# EAGLE board CT_schematic (EAGLE 7.6.0)

Size 100 x 80 mm. Coordinates in mm from the lower left corner, seen from the top.
Outline: 0,0 100,0 100,80 0,80 0,0
Copper layers (1*16): Top 0.035mm / dielectric 1.5mm / Bottom 0.035mm
Design rules "default": minimum track width 10mil, minimum drill 24mil, track to track 8mil, track to pad 8mil, pad to pad 8mil, via to via 8mil, smd to smd 8mil, copper to edge 40mil, drill to drill 8mil, minimum pad ring 10mil, minimum via ring 8mil, stop-mask expansion 4mil, vias tented up to drill 0mil, thermal gap 10mil

## Footprints (pad centres in the part's own frame; a part is rotated, then mirrored left to right if it is on the bottom)
C0603 = smd 0.8 x 0.8: 1 -0.762,0; 2 0.762,0
C0402 = smd 0.5 x 0.5: 1 -0.508,0; 2 0.508,0
C0805 = smd 1.2 x 1.3: 1 -1.016,0; 2 1.016,0
C1206 = smd 1.3 x 1.6: 1 -1.524,0; 2 1.524,0
L0603 = smd 0.8 x 0.8: 1 -0.762,0; 2 0.762,0
L0805 = smd 1.2 x 1.3: 1 -1.016,0; 2 1.016,0
R0603 = smd 0.8 x 0.8: 1 -0.762,0; 2 0.762,0
LQFP64 = smd 0.3 x 1.2: 1 -3.75,-5.75; 2 -3.25,-5.75; 3 -2.75,-5.75; 4 -2.25,-5.75; 5 -1.75,-5.75; 6 -1.25,-5.75; 7 -0.75,-5.75; 8 -0.25,-5.75; 9 0.25,-5.75; 10 0.75,-5.75; 11 1.25,-5.75; 12 1.75,-5.75; 13 2.25,-5.75; 14 2.75,-5.75; 15 3.25,-5.75; 16 3.75,-5.75; 33 3.75,5.75; 34 3.25,5.75; 35 2.75,5.75; 36 2.25,5.75; 37 1.75,5.75; 38 1.25,5.75; 39 0.75,5.75; 40 0.25,5.75; 41 -0.25,5.75; 42 -0.75,5.75; 43 -1.25,5.75; 44 -1.75,5.75; 45 -2.25,5.75; 46 -2.75,5.75; 47 -3.25,5.75; 48 -3.75,5.75 | smd 1.2 x 0.3: 17 5.75,-3.75; 18 5.75,-3.25; 19 5.75,-2.75; 20 5.75,-2.25; 21 5.75,-1.75; 22 5.75,-1.25; 23 5.75,-0.75; 24 5.75,-0.25; 25 5.75,0.25; 26 5.75,0.75; 27 5.75,1.25; 28 5.75,1.75; 29 5.75,2.25; 30 5.75,2.75; 31 5.75,3.25; 32 5.75,3.75; 49 -5.75,3.75; 50 -5.75,3.25; 51 -5.75,2.75; 52 -5.75,2.25; 53 -5.75,1.75; 54 -5.75,1.25; 55 -5.75,0.75; 56 -5.75,0.25; 57 -5.75,-0.25; 58 -5.75,-0.75; 59 -5.75,-1.25; 60 -5.75,-1.75; 61 -5.75,-2.25; 62 -5.75,-2.75; 63 -5.75,-3.25; 64 -5.75,-3.75
SOIC-8 = smd 1.6 x 0.6: 1 -2.7,1.905 | smd 1.55 x 0.6: 2 -2.7,0.635; 3 -2.7,-0.635; 4 -2.7,-1.905; 5 2.7,-1.905; 6 2.7,-0.635; 7 2.7,0.635; 8 2.7,1.905
SAMTEC_FTSH-105-01-L-DV-K = smd 0.762 x 2.794: 1 -2.54,-2.032; 2 -2.54,2.032; 3 -1.27,-2.032; 4 -1.27,2.032; 5 0,-2.032; 6 0,2.032; 7 1.27,-2.032; 8 1.27,2.032; 9 2.54,-2.032; 10 2.54,2.032
WNG008 = smd 0.45 x 0.55: 1 -1.27,0; 2 0,0; 3 1.27,0; 4 2.54,0; 5 2.54,7.5; 6 1.27,7.5; 7 0,7.5; 8 -1.27,7.53 | smd 4.9 x 4.75: PAD 0.635,3.75
ABLS-25.000MHZ-B2F-T = smd 5.6 x 2.8: 1 -3.81,0; 2 5.69,0
ASEK = smd 1.4 x 1: 1 -1.1,-0.8; 2 1.1,-0.8; 3 1.1,0.8; 4 -1.1,0.8
TSOT-23-5 = smd 1.3 x 0.62: 1 -1.31,0.95; 2 -1.31,0; 3 -1.31,-0.95; 4 1.31,-0.95; 5 1.31,0.95
DFN8_2X3MC = smd 0.813 x 0.305: 1 -1.398,0.75; 2 -1.398,0.25; 3 -1.398,-0.25; 4 -1.398,-0.75; 5 1.398,-0.75; 6 1.398,-0.25; 7 1.398,0.25; 8 1.398,0.75 | smd 1.753 x 1.549: 9 0,0
JST-2-SMD = smd 1 x 4.6: 1 -1,-3.7; 2 1,-3.7 | smd 1.6 x 3.4: NC1 -3.4,1.5; NC2 3.4,1.5
FCI_10118193-0001LF = smd 0.4 x 1.35: 1 -1.3,2.675; 2 -0.65,2.675; 3 0,2.675; 4 0.65,2.675; 5 1.3,2.675 | smd 1.6 x 1.4: 6 -3.2,2.45; 7 3.2,2.45 | smd 1.9 x 1.9: 8 -1.2,0; 9 1.2,0 | hole 0.5: -3.3,0; 3.3,0
SON-6 = smd 0.55 x 0.3: 1 -0.355,0.5 | smd 0.52 x 0.3: 2 -0.37,0; 3 -0.37,-0.5; 4 0.37,-0.5; 5 0.37,0; 6 0.37,0.5
SW_4-1437565-2 = smd 1.4 x 2.1: 1 -2.23,4.55; 2 -2.23,-4.55; 3 2.23,4.55; 4 2.23,-4.55
LGM67K-G1J2-24-Z = smd 0.8 x 1.4: A -2,0; C 0,0
NC7SZ125M5X = smd 1.3 x 0.7: 1 -1.3,0.95; 2 -1.3,0; 3 -1.3,-0.95; 4 1.3,-0.95; 5 1.3,0.95
DUMMY_PACKAGE_137 = drill 0.3: 1 0,-1; 2 1.5,-1; 3 3,-1

## Placement (x,y rotation side)
C1  1e-06  [C0603]  -27.94,58.42 0 top  (outside the outline)
C2  1e-07  [C0603]  -31.75,58.42 0 top  (outside the outline)
C3  1e-07  [C0603]  -35.56,58.42 0 top  (outside the outline)
C4  1e-07  [C0603]  -39.37,58.42 0 top  (outside the outline)
C5  1e-07  [C0603]  -43.18,58.42 0 top  (outside the outline)
C6  1e-07  [C0603]  -46.99,58.42 0 top  (outside the outline)
C7  4.7e-06  [C0603]  -24.13,58.42 0 top  (outside the outline)
C8  1e-08  [C0603]  -50.8,58.42 0 top  (outside the outline)
C9  1e-06  [C0603]  -54.61,58.42 0 top  (outside the outline)
C10  1e-11  [C0402]  -26.67,63.5 0 top  (outside the outline)
C11  1e-11  [C0402]  -30.48,63.5 0 top  (outside the outline)
C12  1e-08  [C0402]  -34.29,63.5 0 top  (outside the outline)
C13  1e-07  [C0402]  -38.1,63.5 0 top  (outside the outline)
C14  1e-08  [C0402]  -41.91,63.5 0 top  (outside the outline)
C15  1e-08  [C0402]  -45.72,63.5 0 top  (outside the outline)
C16  1e-05  [C0805]  -21.59,46.99 0 top  (outside the outline)
C17  1e-05  [C0805]  -26.67,46.99 0 top  (outside the outline)
C18  1e-07  [C0402]  -49.53,63.5 0 top  (outside the outline)
C19  1e-05  [C1206]  -49.53,39.37 0 top  (outside the outline)
C20  1e-05  [C1206]  -55.88,39.37 0 top  (outside the outline)
C21  1e-08  [C0402]  -53.34,63.5 0 top  (outside the outline)
C22  1e-08  [C0402]  -57.15,63.5 0 top  (outside the outline)
F1  240.0  [L0603]  -58.42,58.42 0 top  (outside the outline)
I1  2.2e-06  [L0805]  -31.75,46.99 0 top  (outside the outline)
R2  1000.0  [R0603]  -62.23,58.42 0 top  (outside the outline)
R4  4700.0  [R0603]  -66.04,58.42 0 top  (outside the outline)
R5  10000.0  [R0603]  -64.77,46.99 0 top  (outside the outline)
R6  10000.0  [R0603]  -15.24,53.34 0 top  (outside the outline)
R7  10000.0  [R0603]  -20.32,53.34 0 top  (outside the outline)
R8  10000.0  [R0603]  -25.4,53.34 0 top  (outside the outline)
R9  10000.0  [R0603]  -30.48,53.34 0 top  (outside the outline)
R10  10000.0  [R0603]  -35.56,53.34 0 top  (outside the outline)
R11  10000.0  [R0603]  -40.64,53.34 0 top  (outside the outline)
R12  10000.0  [R0603]  -45.72,53.34 0 top  (outside the outline)
R13  5.0  [R0603]  -15.24,63.5 0 top  (outside the outline)
R14  10000.0  [R0603]  -50.8,53.34 0 top  (outside the outline)
R15  10000.0  [R0603]  -55.88,53.34 0 top  (outside the outline)
R16  10000.0  [R0603]  -60.96,53.34 0 top  (outside the outline)
R17  220000.0  [R0603]  -49.53,46.99 0 top  (outside the outline)
R18  1000000.0  [R0603]  -44.45,46.99 0 top  (outside the outline)
R19  10000.0  [R0603]  -66.04,53.34 0 top  (outside the outline)
R20  10000.0  [R0603]  -15.24,58.42 0 top  (outside the outline)
R21  9100.0  [R0603]  -19.05,63.5 0 top  (outside the outline)
R22  680000.0  [R0603]  -54.61,46.99 0 top  (outside the outline)
R23  120000.0  [R0603]  -59.69,46.99 0 top  (outside the outline)
R24  2000.0  [R0603]  -22.86,63.5 0 top  (outside the outline)
R25  10000.0  [R0603]  -20.32,58.42 0 top  (outside the outline)
U1  STM32F301R8T6  [LQFP64]  -53.34,7.62 0 top  (outside the outline)
U2  AT25160B-SSHL-T  [SOIC-8]  -24.13,31.75 0 top  (outside the outline)
U3  FTSH-105-01-L-DV-K  [SAMTEC_FTSH-105-01-L-DV-K]  -35.56,7.62 0 top  (outside the outline)
U4  S25FL128SDPNFI001  [WNG008]  -48.26,17.78 0 top  (outside the outline)
U5  ABLS-25.000MHZ-B2F-T  [ABLS-25.000MHZ-B2F-T]  -26.67,40.64 0 top  (outside the outline)
U6  ASEK-32.768KHz-ECST  [ASEK]  -55.88,30.48 0 top  (outside the outline)
U7  ltc3406es5  [TSOT-23-5]  -36.83,46.99 0 top  (outside the outline)
U8  MCP73831T-2ACI/MC  [DFN8_2X3MC]  -20.32,67.31 0 top  (outside the outline)
U9  S2B-PH-SM4-TB(LF)(SN)  [JST-2-SMD]  -60.96,21.59 0 top  (outside the outline)
U10  10118193-0001LF  [FCI_10118193-0001LF]  -34.29,30.48 0 top  (outside the outline)
U11  TPS3895ADRYR  [SON-6]  -13.97,67.31 0 top  (outside the outline)
U12  4-1437565-2  [SW_4-1437565-2]  -27.94,20.32 0 top  (outside the outline)
U13  Q65110A2395  [LGM67K-G1J2-24-Z]  -38.1,39.37 0 top  (outside the outline)
U14  nc7sz125m5x  [NC7SZ125M5X]  -60.96,38.1 0 top  (outside the outline)
U15  nc7sz125m5x  [NC7SZ125M5X]  -15.24,46.99 0 top  (outside the outline)
U16  Dummy  [DUMMY_PACKAGE_137]  -63.5,63.5 0 top  (outside the outline)

## Library data of the parts
C1-C22 F1 I1 R2 R4-R25 U1-U16 = circuit_tree

## Nets
CLK_CRYSTAL_U1_5: C10.1 U1.5 U5.1
CLK_CRYSTAL_U1_6: C11.1 U1.6 U5.2
CLK_U1_3: U1.3 U6.3
GND: C1.2 C2.2 C3.2 C4.2 C5.2 C6.2 C7.2 C8.2 C9.2 C10.2 C11.2 C12.2 C13.2 C14.2 C15.2 C16.2 C17.1 C17.2 C18.2 C19.2 C20.2 C21.2 C22.2 R2.2 R5.2 R12.2 R13.2 R17.2 R21.2 R23.2 R24.2 U1.12 U1.18 U1.31 U1.47 U1.63 U2.4 U3.3 U3.5 U4.4 U4.PAD U6.2 U7.2 U8.6 U8.9 U9.2 U10.5 U10.6 U10.7 U10.8 U10.9 U11.2 U13.C U14.2 U14.3 U15.1 U15.3 U16.1
INPUT_USBPOWER_5V: C19.1 R25.2 U8.1 U8.2 U10.1
NET_U1_7: R4.1 U1.7 U15.4
NET_U1_13: C8.1 C9.1 F1.1 U1.13
NET_U1_60: R5.1 U1.60
NET_U1_61: U13.A
NET_U1_62: U12.3 U12.4
NET_U2_3: R6.1 U2.3
NET_U2_7: R8.1 U2.7
NET_U3_9: R13.1 U3.9
NET_U4_3: R14.1 U4.3
NET_U4_7: R16.1 U4.7
NET_U7_1: U7.1
NET_U7_3: I1.1 U7.3
NET_U7_5: R17.1 R18.1 U7.5
NET_U7_ATNET_3: I1.2 R18.2
NET_U8_5: R25.1 U8.5
NET_U8_8: R24.1 U8.8
NET_U11_1: R20.1 R21.1 U11.1
NET_U11_3: R22.2 R23.1 U11.3
NET_U11_4: R19.1 U11.4 U14.4 U15.2
NET_U12_1: R2.1 U12.1 U12.2
PROC_SPI2_MISO: U1.35 U4.2
PROC_SPI2_MOSI: U1.36 U4.5
PROC_SPI2_NSS: R15.1 U1.33 U4.1
PROC_SPI2_SCK: U1.34 U4.6
PROC_SPI3_MISO: U1.52 U2.2
PROC_SPI3_MOSI: U1.53 U2.5
PROC_SPI3_NSS: R7.1 U1.20 U2.1
PROC_SPI3_SCK: U1.51 U2.6
PROC_SYS_JTCK_SWCLK: R12.1 U1.49 U3.4
PROC_SYS_JTDI: R10.1 U1.50 U3.8
PROC_SYS_JTDO_TRACESWO: U1.55 U3.6
PROC_SYS_JTMS_SWDIO: R11.1 U1.46 U3.2
PROC_TIM1_CH2: U1.9 U16.2
PROC_TIM1_CH4: U1.11 U16.3
RST_OUT_U3_JTAG_RST_B: R9.1 U3.10 U14.1
VCC_S1_3V7: C16.1 C20.1 U7.4 U8.3 U8.4 U9.1
VCC_TIER1_3V3: C1.1 C2.1 C3.1 C4.1 C5.1 C6.1 C7.1 C12.1 C13.1 C14.1 C15.1 C17.2 C18.1 C21.1 C22.1 F1.2 I1.2 R4.2 R6.2 R7.2 R8.2 R9.2 R10.2 R11.2 R14.2 R15.2 R16.2 R18.2 R19.2 R20.2 R22.1 U1.1 U1.19 U1.32 U1.48 U1.64 U2.8 U3.1 U4.8 U6.4 U11.6 U14.5 U15.5

## Tracks (layer width: path | path; a pad name or v marks a point on that pad's centre or on a via)
CLK_CRYSTAL_U1_5  (2 unrouted)
CLK_CRYSTAL_U1_6  (2 unrouted)
CLK_U1_3  (1 unrouted)
GND  (57 unrouted)
INPUT_USBPOWER_5V  (4 unrouted)
NET_U1_7  (2 unrouted)
NET_U1_13  (3 unrouted)
NET_U1_60  (1 unrouted)
NET_U1_62  (1 unrouted)
NET_U2_3  (1 unrouted)
NET_U2_7  (1 unrouted)
NET_U3_9  (1 unrouted)
NET_U4_3  (1 unrouted)
NET_U4_7  (1 unrouted)
NET_U7_3  (1 unrouted)
NET_U7_5  (2 unrouted)
NET_U7_ATNET_3  (1 unrouted)
NET_U8_5  (1 unrouted)
NET_U8_8  (1 unrouted)
NET_U11_1  (2 unrouted)
NET_U11_3  (2 unrouted)
NET_U11_4  (3 unrouted)
NET_U12_1  (2 unrouted)
PROC_SPI2_MISO  (1 unrouted)
PROC_SPI2_MOSI  (1 unrouted)
PROC_SPI2_NSS  (2 unrouted)
PROC_SPI2_SCK  (1 unrouted)
PROC_SPI3_MISO  (1 unrouted)
PROC_SPI3_MOSI  (1 unrouted)
PROC_SPI3_NSS  (2 unrouted)
PROC_SPI3_SCK  (1 unrouted)
PROC_SYS_JTCK_SWCLK  (2 unrouted)
PROC_SYS_JTDI  (2 unrouted)
PROC_SYS_JTDO_TRACESWO  (1 unrouted)
PROC_SYS_JTMS_SWDIO  (2 unrouted)
PROC_TIM1_CH2  (1 unrouted)
PROC_TIM1_CH4  (1 unrouted)
RST_OUT_U3_JTAG_RST_B  (2 unrouted)
VCC_S1_3V7  (5 unrouted)
VCC_TIER1_3V3  (42 unrouted)